# Altium PCB ColourBreakout.PcbDoc
Units mil, origin at the board's own origin, x right, y up, seen from the top; angles counter-clockwise.
Board outline 1400 x 930 mil, 2 copper layers (Top Layer, Bottom Layer); 2 components, 5 nets, 16 pads, 0 vias.
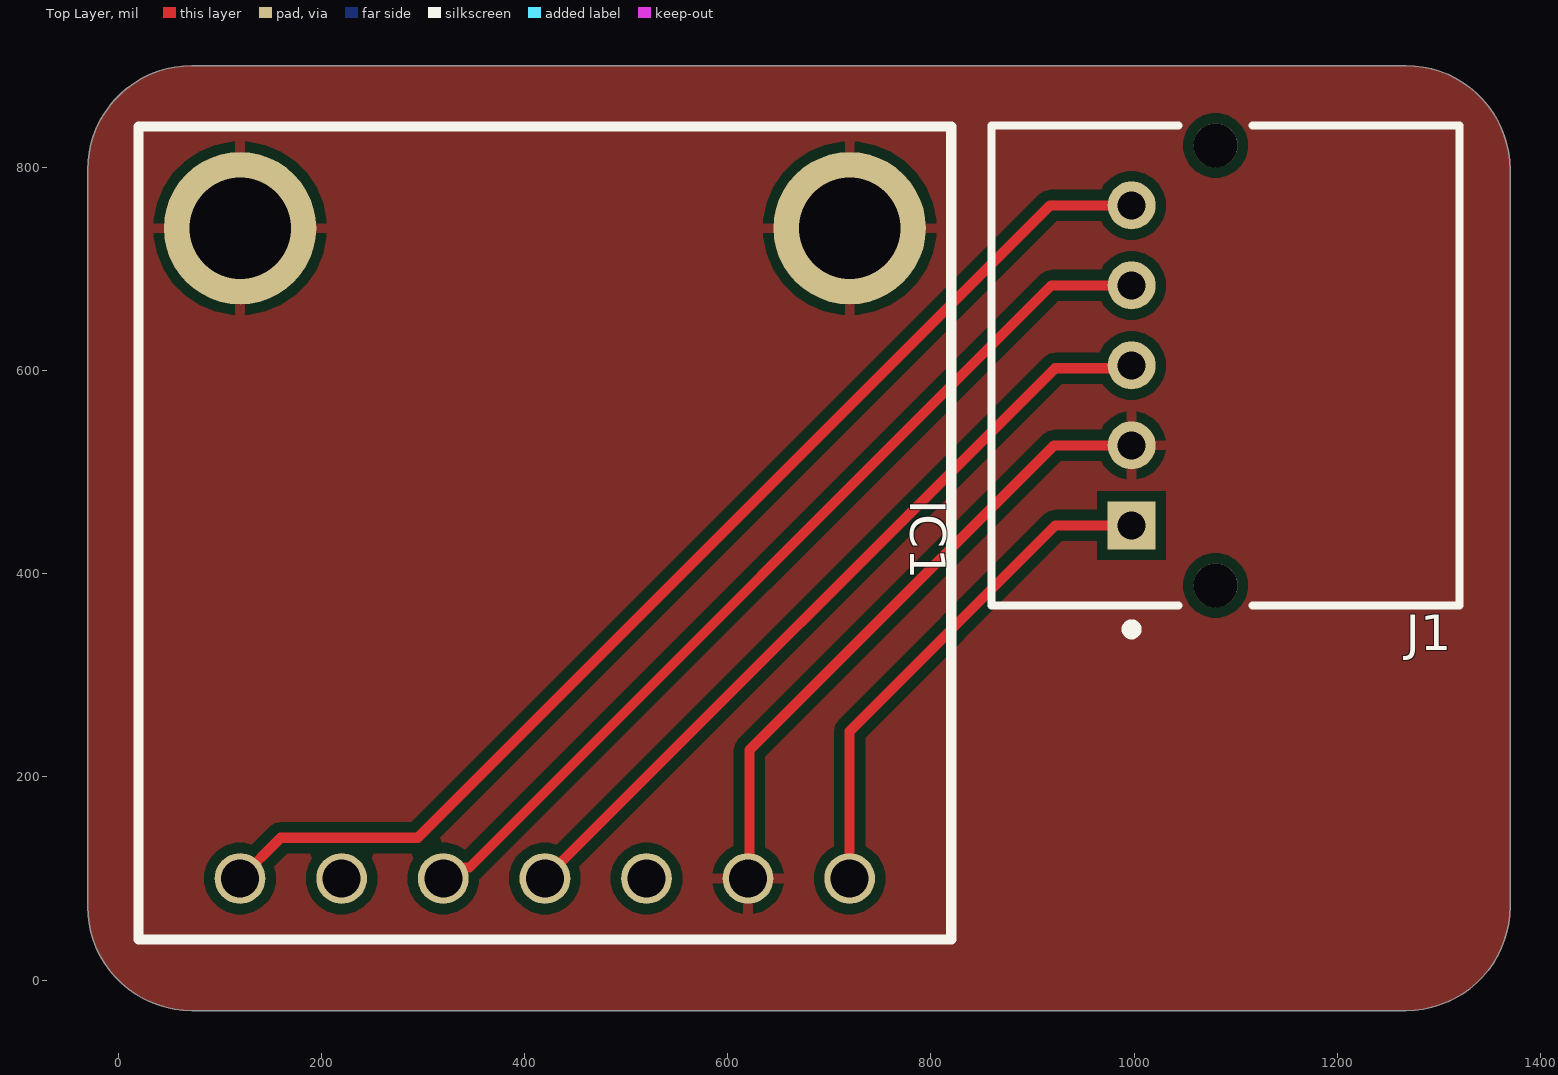
[diagram p0: Top Layer view]
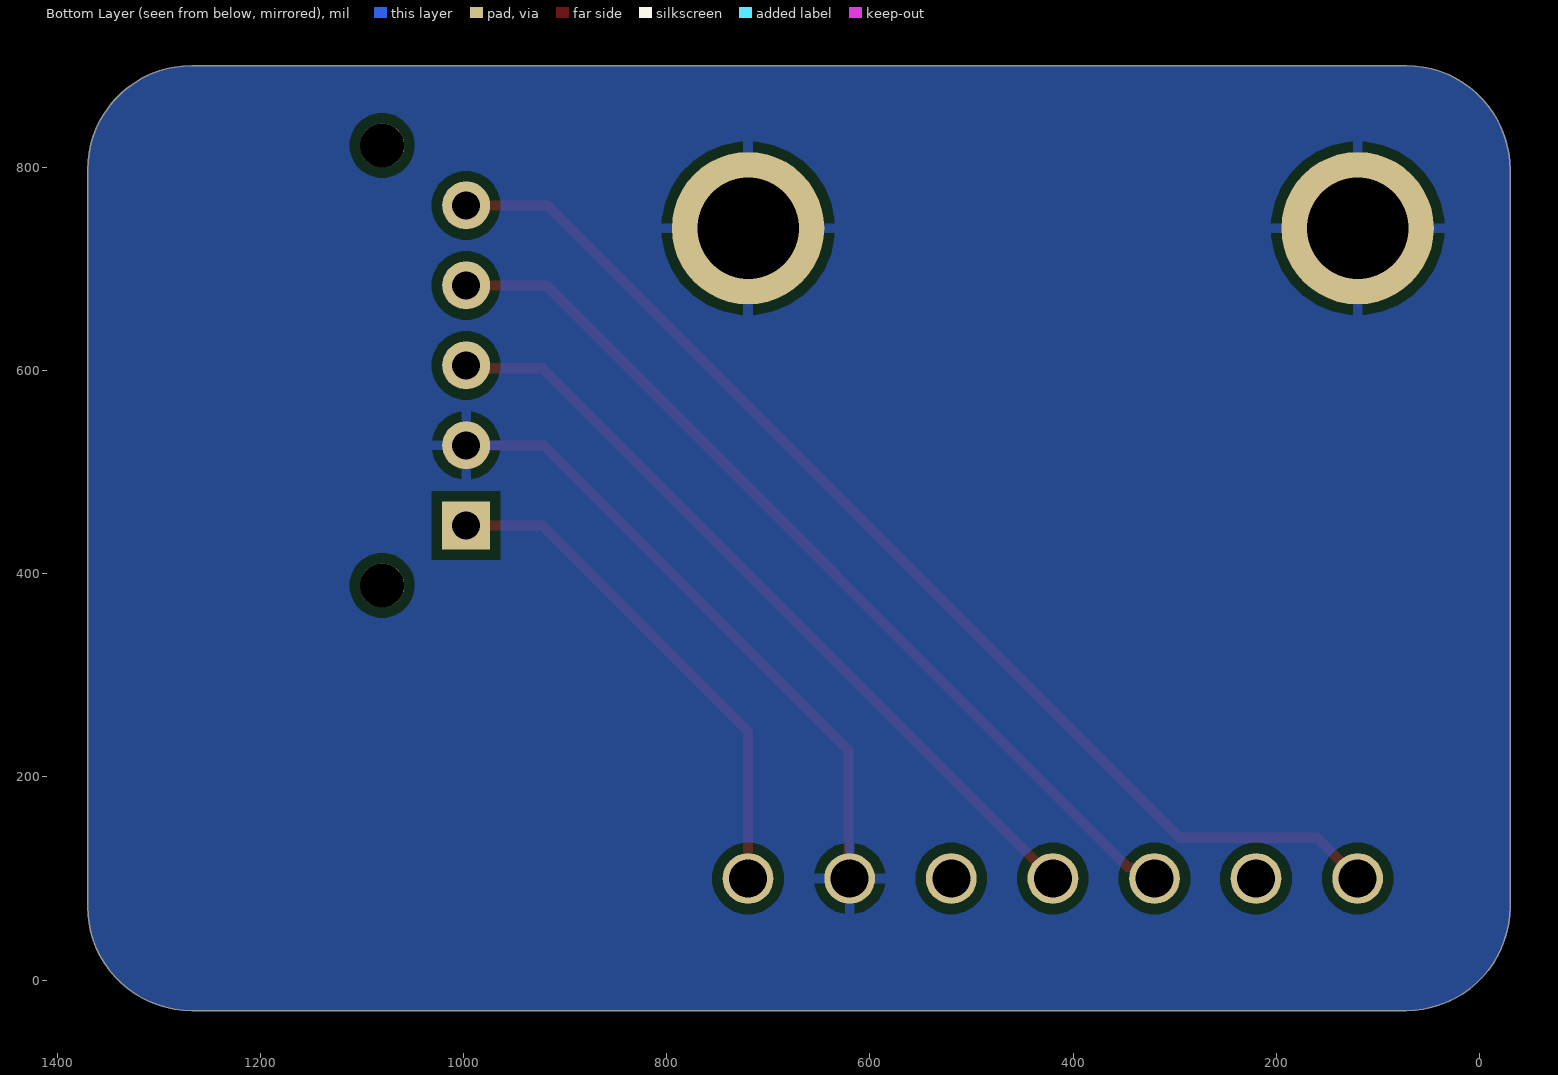
[diagram p1: Bottom Layer view, seen from below]

## Layer stack, top to bottom
Top Solder: solder mask 0.4, Solder Resist, Dk 3.5
Top Layer: signal copper 1.4
Dielectric 1: dielectric 12.6, FR-4, Dk 4.8
Bottom Layer: signal copper 1.4
Bottom Solder: solder mask 0.4, Solder Resist, Dk 3.5

## Board outline
-29.99,72.41 -29.99,797.6 cw(c72.41,797.6) 72.41,900.01 1267.6,900.01 cw(c1267.6,797.6) 1370.01,797.6 1370.01,72.41 cw(c1267.6,72.41) 1267.6,-29.99 72.41,-29.99 cw(c72.41,72.41)

## Design rules (kind name [scope] priority, off if disabled: settings)
Clearance [All] p1: gap=10 ignorepadtopadclearanceinfootprint=FALSE except(0: Arc-Hole Track-Hole SMDPad-Hole THPad-Hole Via-Hole Fill-Hole Poly-Hole Region-Hole Text-Hole)
PolygonConnect [All] p1: connectstyle=Relief reliefconductorwidth=10 reliefentries=4 polygonreliefangle="90 Angle" airgapwidth=10
RoutingVias [All] p1: holewidth=28 width=50 viastyle="Through Hole" minholewidth=28 minwidth=50 maxholewidth=28 maxwidth=50
SolderMaskExpansion [All] p1: expansion=4 istentingtop=FALSE
Width [All] p1: maxlimit=10 minlimit=10 preferedwidth=10
30 further rules are at their usual default settings.

## Components (designator, comment, footprint, x,y, rotation, side; value= is the part's Value field where it differs from the comment)
IC1 "Adafruit TCS34725" "Adafruit TCS34725-Footprint-1" 420.01,440.01 r0 top
J1 "S05B-PASK-2(LF)(SN)" FP-S05B-PASK-2_LF_SN-MFG 1090.01,605.01 r270 top

## Footprints (in the part's own frame and the unit in brackets; to place one, negate y for a bottom-side part, rotate by r counter-clockwise, add the part's x,y. Pads: shape width x height; smd on the part's side, far side on the other; paste and mask are expansions set on the pad)
"Adafruit TCS34725-Footprint-1" [mil]
  round 50 hole 37.4: 1(-300,-340) 2(-200,-340) 3(-100,-340) 4(0,-340) 5(100,-340) 6(200,-340) 7(300,-340)
  round 150 hole 100: GND1(-300,300) GND2(300,300)
  silkscreen extent -400,-400 400,400
FP-S05B-PASK-2_LF_SN-MFG [mm]
  rect 1.2x1.2 hole 0.7 paste-1000 mask+0: 1(4,-2.35)
  round 1.2 hole 0.7 paste-1000 mask+0: 2(2,-2.35) 3(0,-2.35) 4(-2,-2.35) 5(-4,-2.35)
  round 1.1 hole 1.1 unplated paste-1000 mask+0: ""(-5.5,-0.25) ""(5.5,-0.25)
  silkscreen extent -6,-5.85 6.72,5.85, body extent -6.15,-5.95 6.15,5.95, height 0.25

## Part data
IC1: library part CMP-001-0002-1
J1: library part CMP-17439-000393-1, "CONN HEADER R/A 5POS 2MM", Color=Natural, Current Rating=3A, Flammability Rating="UL94 V-0", Housing Color=White, Package Quantity=500, Voltage Rating=250V, Connector Type=Header, Contact Finish - Mating=TIN, Contact Material="Copper Alloy", Contact Plating=Tin, Contact Shape=Square, Contact Type="Male Pin", Fastening Type=Ramp, Insulation Color=Natural, Insulation Material=PBT, Lead Free="Lead Free", Mount="Through Hole", Number of Contacts=5, Number of Positions=5, Number of Rows=1, Orientation="Right Angle", Packaging=Bulk, Pitch=2mm, Series=PA, System=Connector, Termination=Solder

## Nets (pads, with @x,y where several pads share a name; then routed paths per layer and width w, separated by ;. In a path a pad name is that pad's centre, name@x,y a point inside that pad or via, vN(x,y) a via of type N, cw(c..) or ccw(c..) an arc to the next point about the centre after c; other vN are vias at no path point)
5V: IC1.7 J1.1 | length 506.4
  Top Layer w10: IC1.7 720.01,245.01 922.53,447.53 J1.1
GND: IC1.6 IC1.GND1 IC1.GND2 J1.2 | length 627.3
  Top Layer w10: IC1.6 621.31,101.31 621.31,226.31 921.27,526.27 J1.2
LED: IC1.1 J1.5 | length 1151.9
  Top Layer w10: IC1.1 160.01,140.01 295.01,140.01 917.49,762.49 J1.5
SCL: IC1.4 J1.3 | length 786.7
  Top Layer w10: IC1.4 922.25,602.25 994.73,602.25 J1.3
SDA: IC1.3 J1.4 | length 919.3
  Top Layer w10: IC1.3 330.83,100.01 341.61,110.79 345.79,110.79 918.75,683.75 J1.4
pads on no net: IC1.2 IC1.5 J1.

## Polygon pours and split planes (outlines as drawn)
GND on Top Layer "Top Ground" (solid, pour order 0): -29.99,72.41 -29.99,797.6 cw(c72.41,797.6) 72.41,900.01 1267.6,900.01 cw(c1267.6,797.6) 1370.01,797.6 1370.01,72.41 cw(c1267.6,72.41) 1267.6,-29.99 72.41,-29.99 cw(c72.41,72.41)
GND on Bottom Layer "Bottom Ground" (solid, pour order 1): -29.99,72.41 -29.99,797.6 cw(c72.41,797.6) 72.41,900.01 1267.6,900.01 cw(c1267.6,797.6) 1370.01,797.6 1370.01,72.41 cw(c1267.6,72.41) 1267.6,-29.99 72.41,-29.99 cw(c72.41,72.41)

## Silkscreen, mask and mechanical layers (free items; w line width, h text height)
Top Solder:
  text "Colour Sensor" at 835.01,90.01 h70
  text "Breakout Board" at 835.06,35.01 h70
Bottom Solder:
  region: 1224 vertices and 7 holes, not listed, extent 202.74,305.12 652.97,717.14
  text "JANK" at 580.01,200.01 h120
  text "Designed by Jouveer" at 690.8,5.59 h70
Mechanical 1:
  the board outline again, w10